# EAGLE board NusbioMCU (EAGLE 7.6.0)
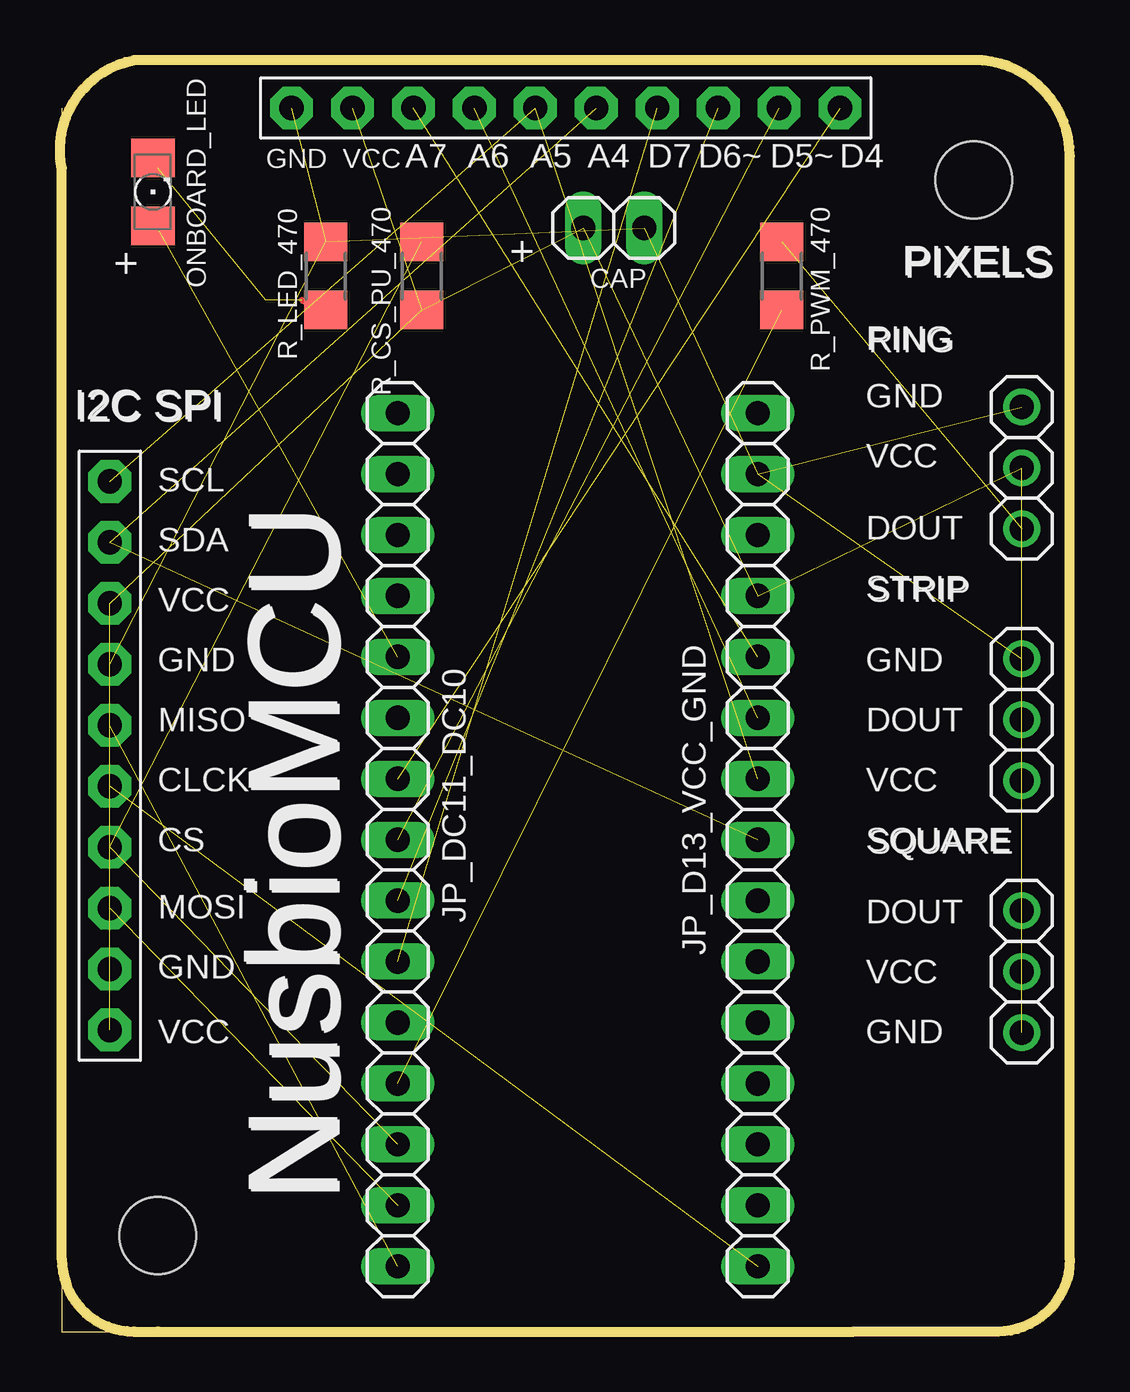
[diagram p0: board, top side]

Size 42.07 x 53 mm. Coordinates in mm from the lower left corner, seen from the top.
Outline: 4.07,0 0.07,0 0.07,3
Outline: 24.07,0 33.07,0
Outline: 39.07,0 40.07,0
Outline: 0.07,51 0.07,48.5
Outline: 0.07,48.5 0.07,42
Outline: 0.07,3 arc90 3.07,0 4.07,0
Outline: 4.07,0 33.07,0
Outline: 39.07,0 arc90 42.07,3 42.07,49 arc90 38.07,53 3.07,53 arc90 0.07,48.5
Outline: 39.07,0 33.07,0
Outline: 0.07,3 0.07,48.5
Copper layers (1*16): Top 0.035mm / dielectric 1.5mm / Bottom 0.035mm
Design rules "default": minimum track width 10mil, minimum drill 24mil, track to track 8mil, track to pad 8mil, pad to pad 8mil, via to via 8mil, smd to smd 8mil, copper to edge 40mil, drill to drill 8mil, minimum pad ring 10mil, minimum via ring 8mil, stop-mask expansion 4mil, vias tented up to drill 0mil, thermal gap 10mil
Holes 3.2 mm at 4.07,4 38.07,48

## Footprints (pad centres in the part's own frame; a part is rotated, then mirrored left to right if it is on the bottom)
1X02 = drill 1.016 long: 1 -1.27,0; 2 1.27,0
1X10-BIG = drill 1.016 pad 1.778 octagon: 1 -11.43,0; 2 -8.89,0; 3 -6.35,0; 4 -3.81,0; 5 -1.27,0; 6 1.27,0; 7 3.81,0; 8 6.35,0; 9 8.89,0; 10 11.43,0
1X03 = drill 1.016: 1 -2.54,0; 2 0,0; 3 2.54,0
1X15 = drill 1.016 long: 1 -17.78,0; 2 -15.24,0; 3 -12.7,0; 4 -10.16,0; 5 -7.62,0; 6 -5.08,0; 7 -2.54,0; 8 0,0; 9 2.54,0; 10 5.08,0; 11 7.62,0; 12 10.16,0; 13 12.7,0; 14 15.24,0; 15 17.78,0
1206 = smd 1.6 x 1.803: A -1.422,0; C 1.422,0
R1206 = smd 1.6 x 1.803: 1 -1.422,0; 2 1.422,0

## Placement (x,y rotation side)
CAP  [1X02]  23.07,46 0 top
DX_AX_PINS  PINHD-1X10  [1X10-BIG]  21.07,51 0 top
JP1  [1X03]  40.07,25.5 270 top
JP2  [1X03]  40.07,15 90 top
JP3  [1X03]  40.07,36 270 top
JP_D13_VCC_GND  [1X15]  29.07,20.5 270 top
JP_DC11_DC10  [1X15]  14.07,20.5 270 top
ONBOARD_LED  [1206]  3.87,47.5 90 top
R_CS_PU_470  [R1206]  15.07,44 90 top
R_LED_470  [R1206]  11.07,44 90 top
R_PWM_470  [R1206]  30.07,44 90 top
SPI_I2C  PINHD-1X10  [1X10-BIG]  2.07,24 90 top

## Library data of the parts
CAP = pinhead
DX_AX_PINS JP1-JP3 JP_D13_VCC_GND JP_DC11_DC10 ONBOARD_LED R_CS_PU_470 R_LED_470 R_PWM_470 SPI_I2C = adafruit

## Nets
A0_SECURITY: JP_D13_VCC_GND.12
A1_LIGHT: JP_D13_VCC_GND.11
A2_MOTION: JP_D13_VCC_GND.10
A3: JP_D13_VCC_GND.9
A4_SDA: DX_AX_PINS.6 JP_D13_VCC_GND.8 SPI_I2C.9
A5_SCL: DX_AX_PINS.5 JP_D13_VCC_GND.7 SPI_I2C.10
A6: DX_AX_PINS.4 JP_D13_VCC_GND.6
A7: DX_AX_PINS.3 JP_D13_VCC_GND.5
D2_SECURITY: JP_DC11_DC10.5 ONBOARD_LED.A
D3_PWM: JP_DC11_DC10.6
D4: DX_AX_PINS.10 JP_DC11_DC10.7
D5_PWM: DX_AX_PINS.9 JP_DC11_DC10.8
D6_PWM: DX_AX_PINS.8 JP_DC11_DC10.9
D7: DX_AX_PINS.7 JP_DC11_DC10.10
D8: JP_DC11_DC10.11
D9_PWM_IN: JP1.2 JP2.3 JP3.3 R_PWM_470.2
D9_PWM_OUT: JP_DC11_DC10.12 R_PWM_470.1
D13_SCK: JP_D13_VCC_GND.15 SPI_I2C.5
DC10_CS: JP_DC11_DC10.13 R_CS_PU_470.2 SPI_I2C.4
DC11_MOSI: JP_DC11_DC10.14 SPI_I2C.3
DC12_MISO: JP_DC11_DC10.15 SPI_I2C.6
GND: CAP.2 DX_AX_PINS.1 JP1.1 JP2.1 JP3.1 JP_D13_VCC_GND.2 R_LED_470.2 SPI_I2C.2 SPI_I2C.7
N$1: ONBOARD_LED.C R_LED_470.1
VCC: CAP.1 DX_AX_PINS.2 JP1.3 JP2.2 JP3.2 JP_D13_VCC_GND.4 R_CS_PU_470.1 SPI_I2C.1 SPI_I2C.8

## Tracks (layer width: path | path; a pad name or v marks a point on that pad's centre or on a via)
A4_SDA  (2 unrouted)
A5_SCL  (2 unrouted)
A6  (1 unrouted)
A7  (1 unrouted)
D2_SECURITY  (1 unrouted)
  Top 0.254: 4.07,46 ONBOARD_LED.A
D4  (1 unrouted)
D5_PWM  (1 unrouted)
D6_PWM  (1 unrouted)
D7  (1 unrouted)
D9_PWM_IN  (3 unrouted)
D9_PWM_OUT  (1 unrouted)
D13_SCK  (1 unrouted)
DC10_CS  (2 unrouted)
DC11_MOSI  (1 unrouted)
DC12_MISO  (1 unrouted)
GND  (8 unrouted)
N$1  (2 unrouted)
  Top 0.254: 4.07,48.5 ONBOARD_LED.C | 10.07,43 R_LED_470.1
VCC  (8 unrouted)

## Text on the board
tNames: GND | VCC | A7 | A6 | A5 | A4 | D7 | D6~ | D5~ | D4 | + | + | PIXELS | PIXELS | RING | RING | I2C SPI | I2C SPI | GND | VCC | SCL | DOUT | SDA | VCC | STRIP | STRIP | GND | GND | MISO | DOUT | CLCK | VCC | CS | SQUARE | SQUARE | MOSI | DOUT | GND | VCC | VCC | GND | NusbioMCU | NusbioMCU
bNames: PCBv6 - 2017.02 - D9 /FT | MadeInTheUSB.net